# Altium PCB PCBREC1.1.PcbDoc
Units mil, origin at the board's own origin, x right, y up, seen from the top; angles counter-clockwise.
Board outline 2635 x 3180 mil, 2 copper layers (Top Layer, Bottom Layer); 35 components, 21 nets, 93 pads, 15 vias.
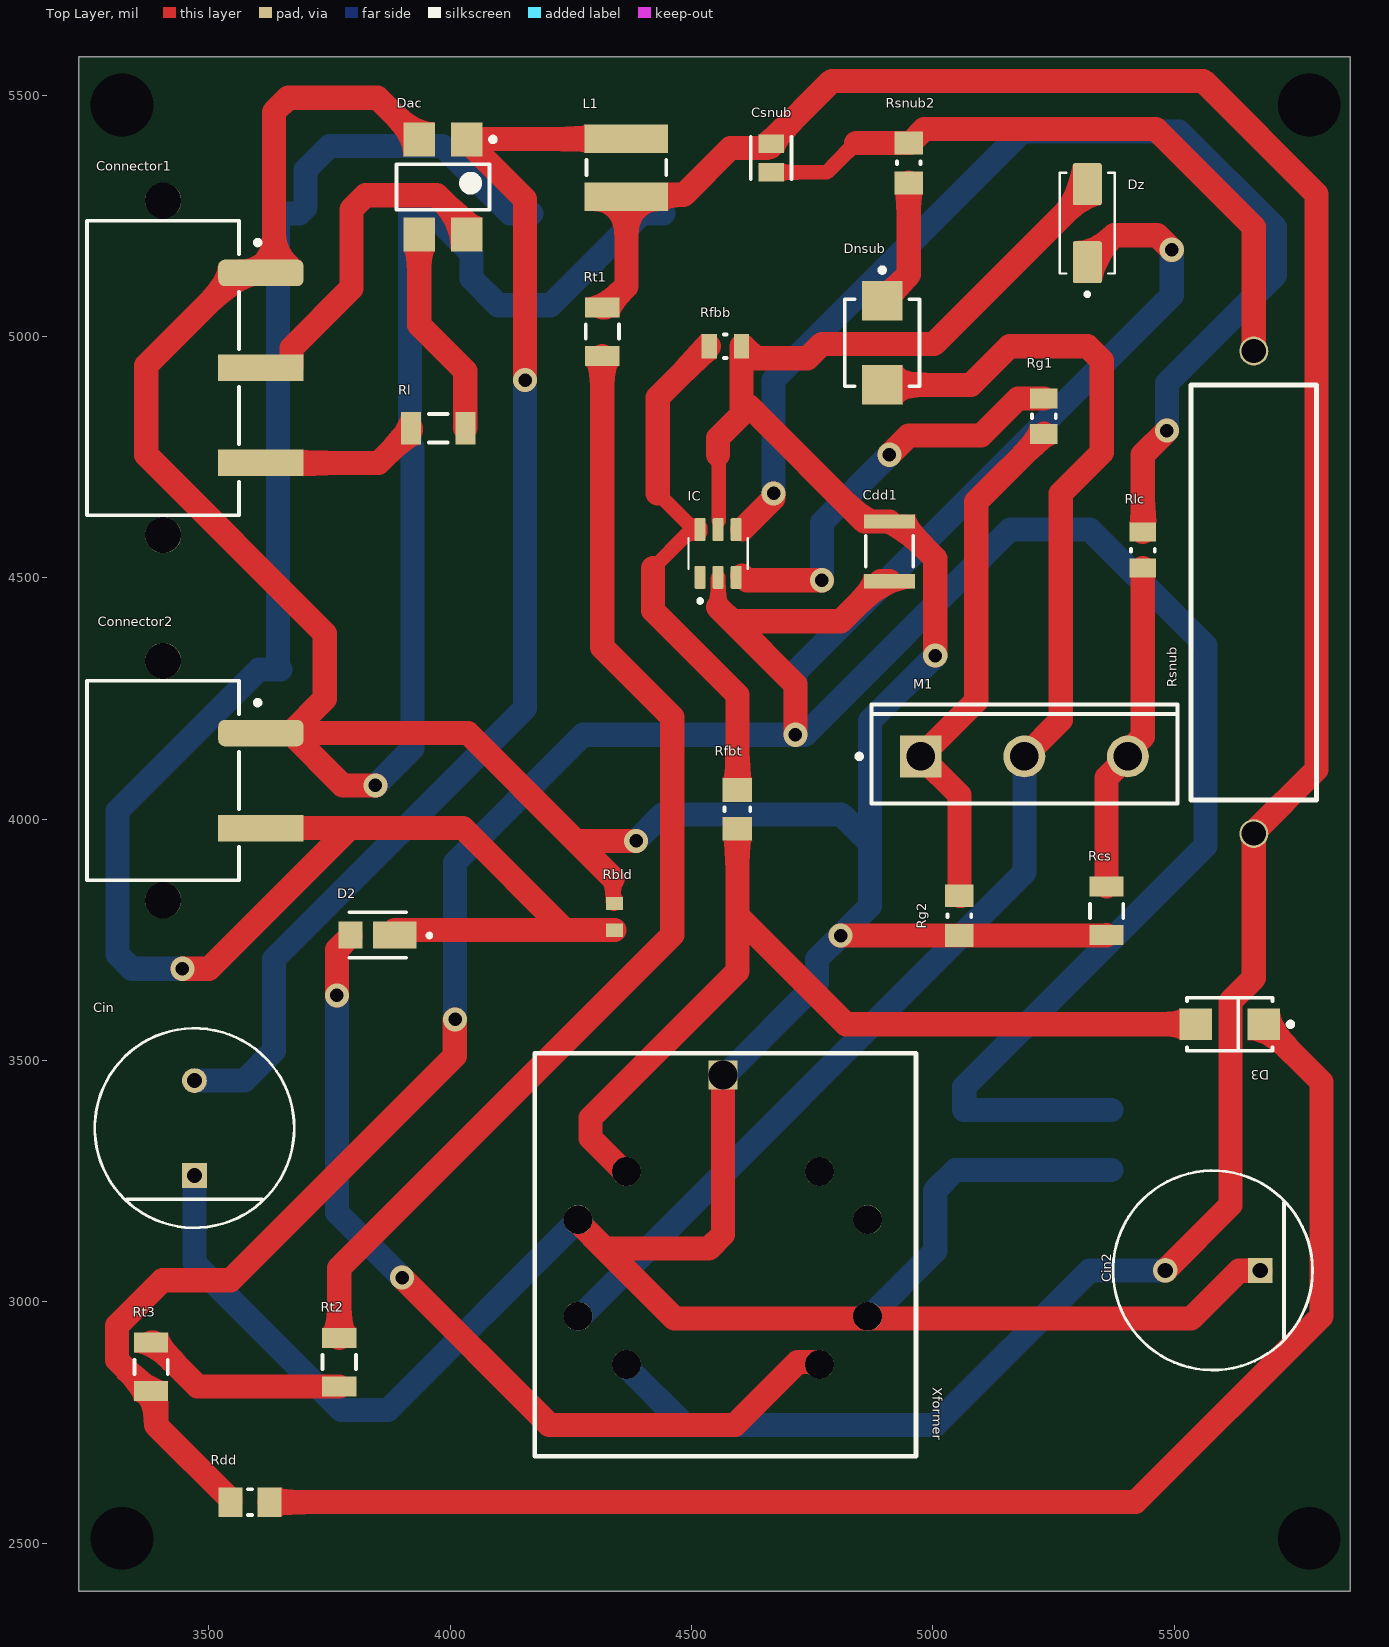
[diagram p0: Top Layer view]
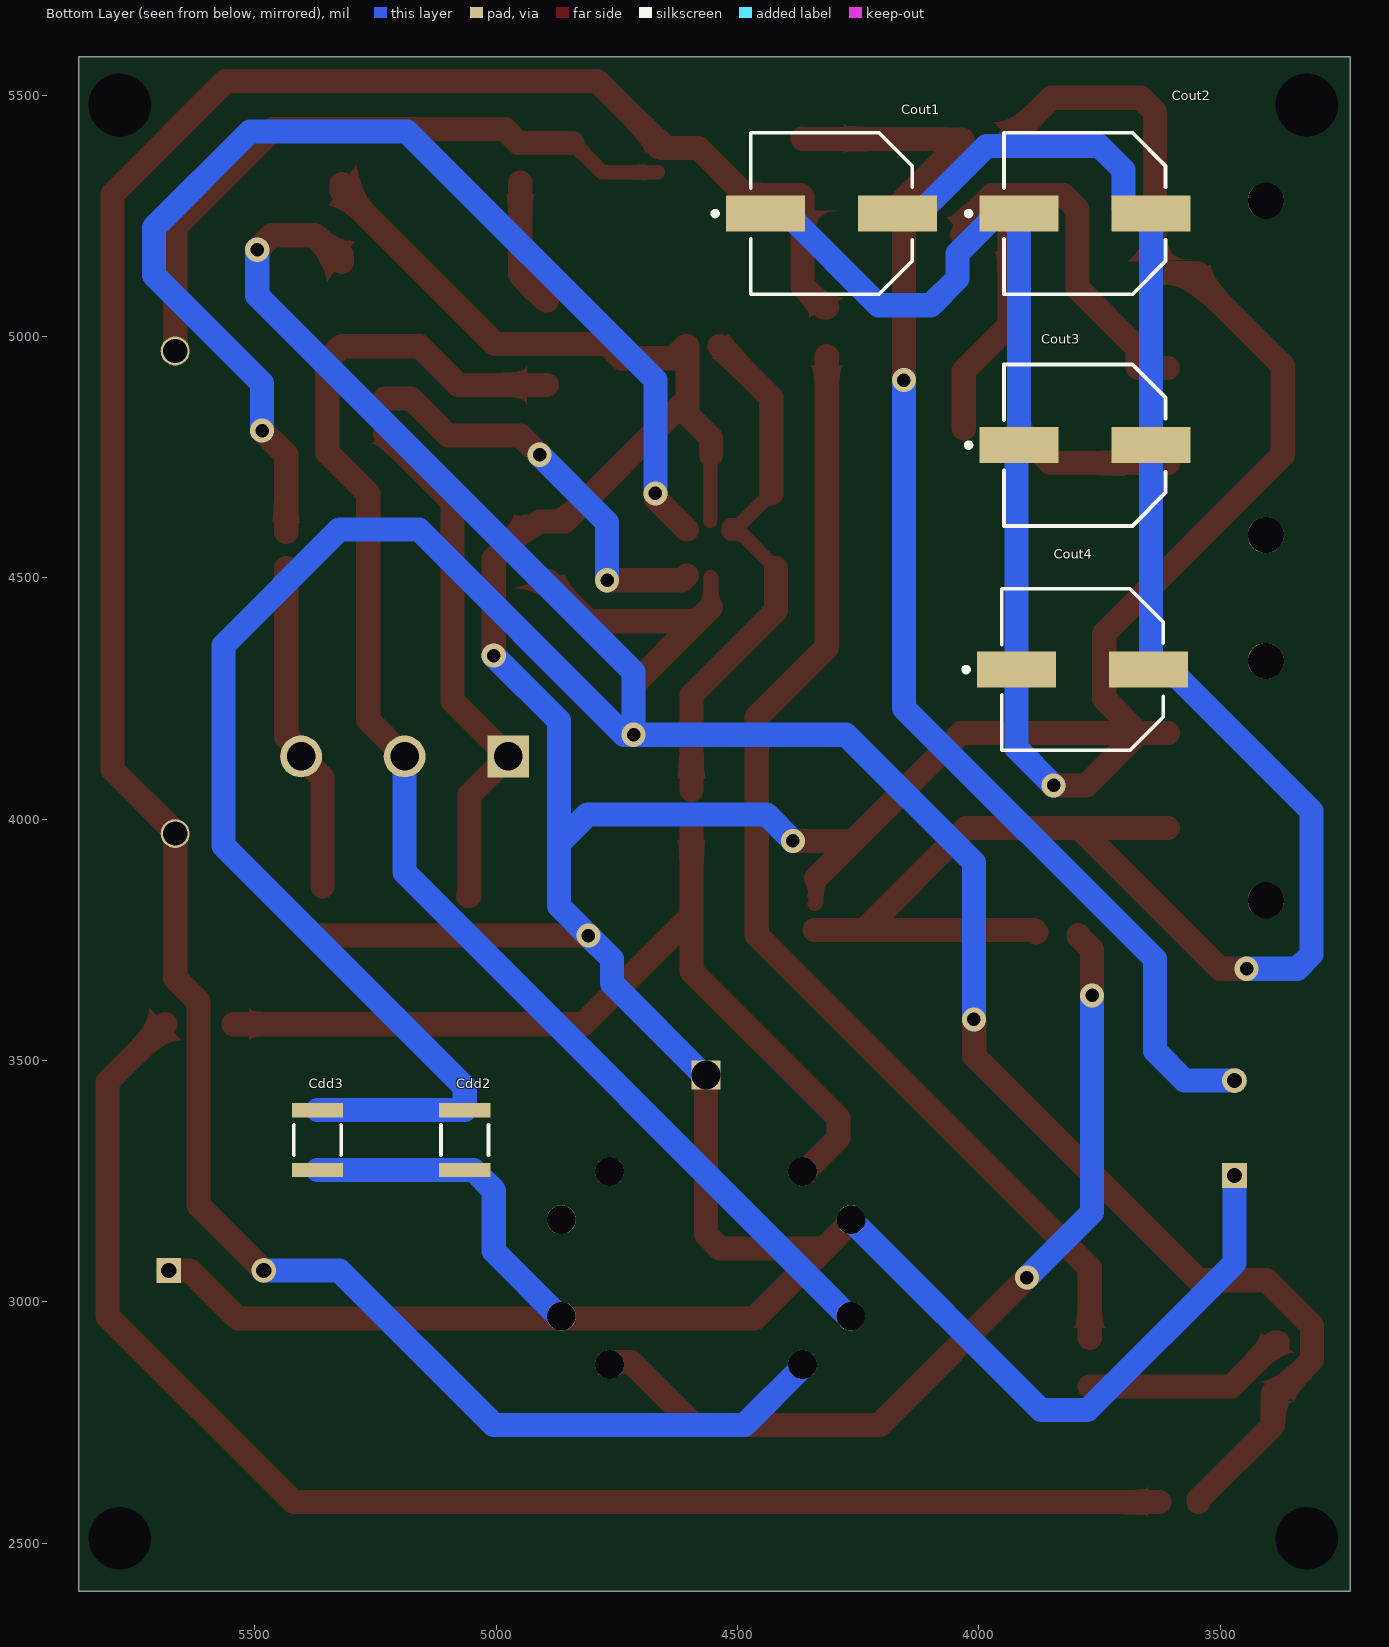
[diagram p1: Bottom Layer view, seen from below]
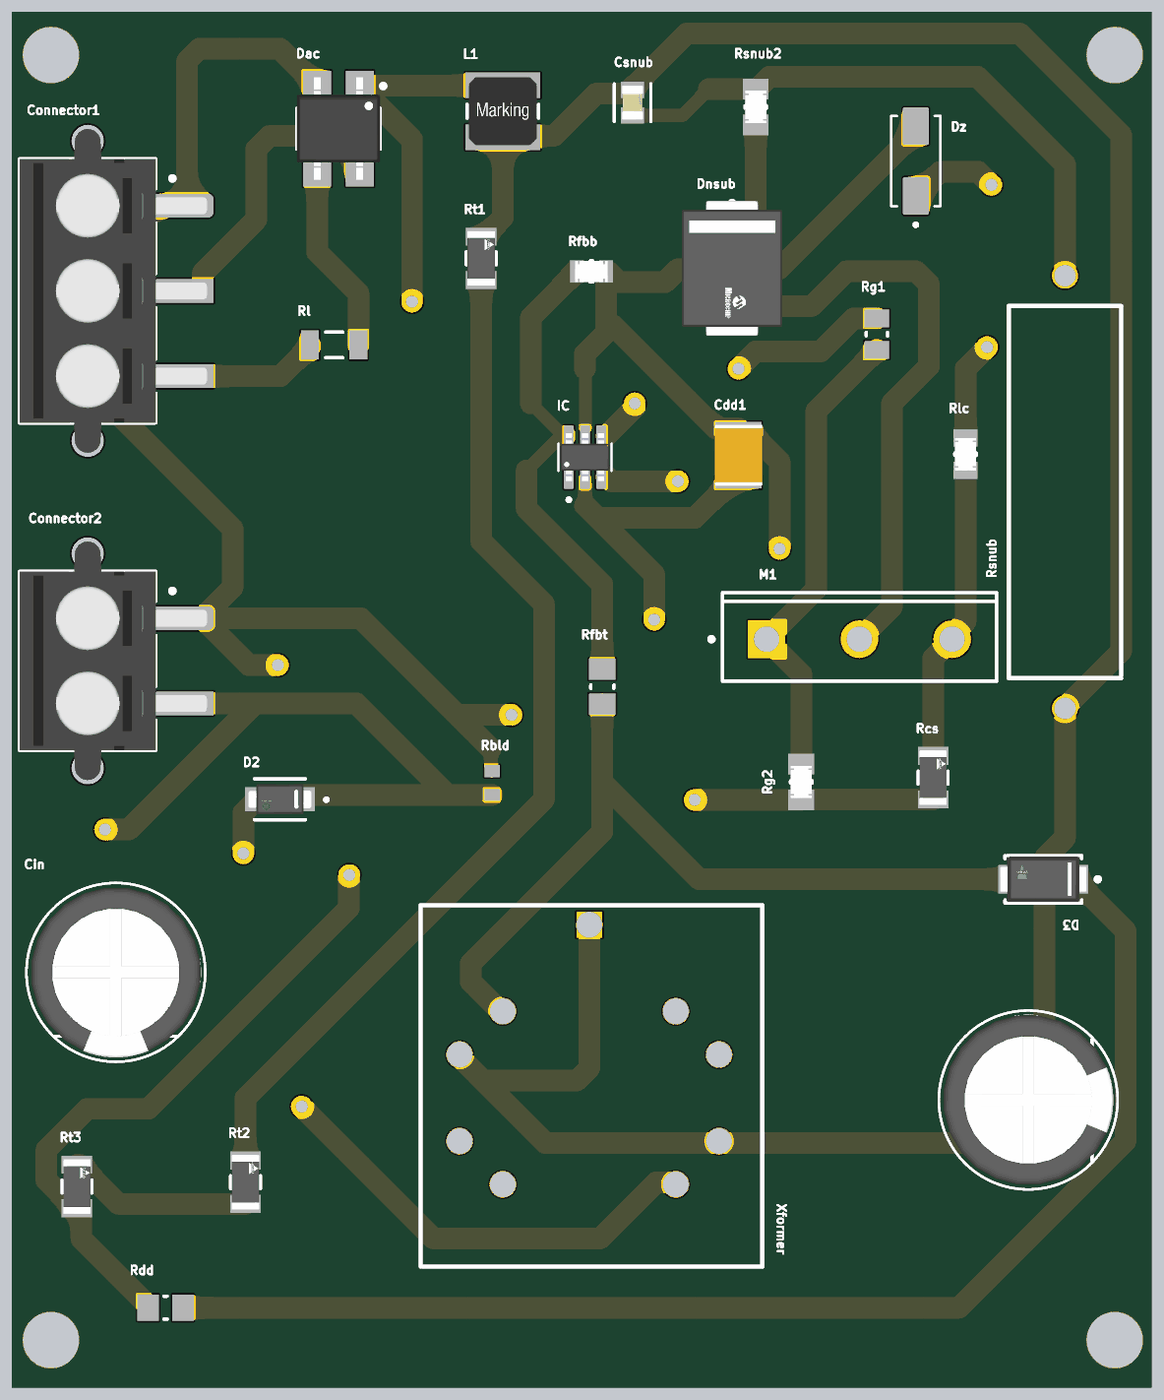
[diagram p2: 3D render of the assembled board from above, using the file's embedded part models]
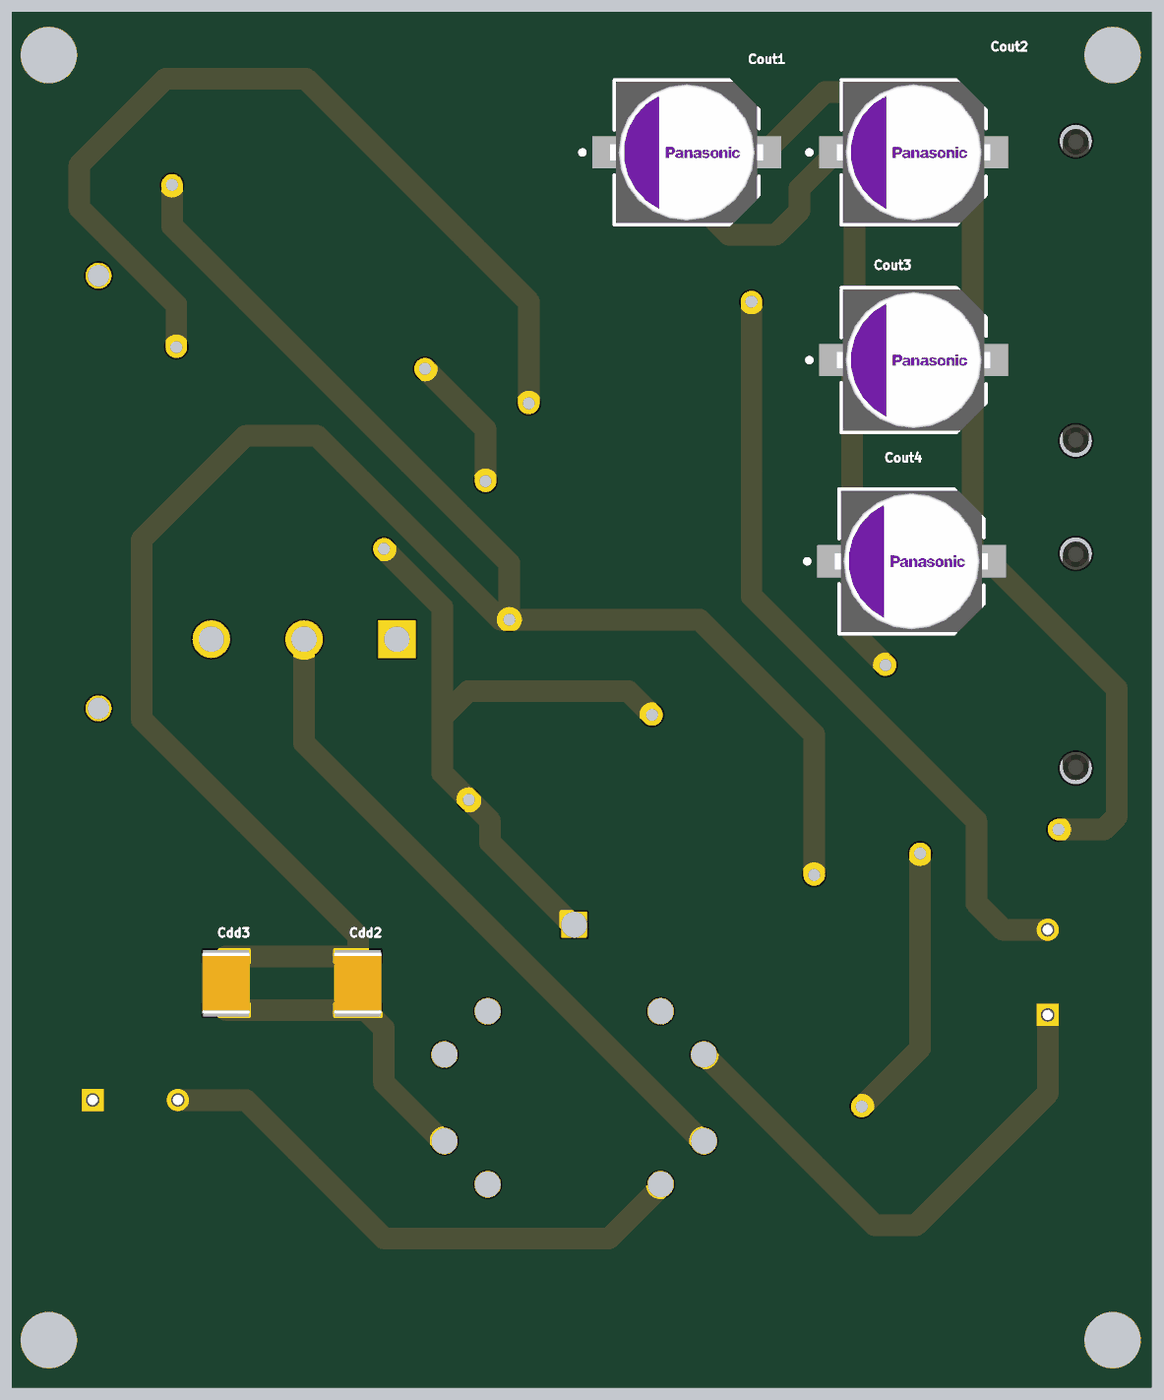
[diagram p3: 3D render of the assembled board from below, using the file's embedded part models]

## Layer stack, top to bottom
Top Solder: solder mask 0.4, Solder Resist, Dk 3.5
Top Layer: signal copper 1.4
Dielectric 1: dielectric 12.6, FR-4, Dk 4.8
Bottom Layer: signal copper 1.4
Bottom Solder: solder mask 0.4, Solder Resist, Dk 3.5

## Board outline
3230,2400 5865,2400 5865,5580 3230,5580

## Design rules (kind name [scope] priority, off if disabled: settings)
Clearance [All] p1: gap=5 ignorepadtopadclearanceinfootprint=FALSE
HoleSize [All] p1: absolutevalues=TRUE maxlimit=250 minlimit=10 maxpercent=80.000 minpercent=20.000
PolygonConnect [All] p1: connectstyle=Relief reliefconductorwidth=10 reliefentries=4 polygonreliefangle="90 Angle" airgapwidth=10
RoutingVias [All] p1: holewidth=28 width=50 viastyle="Through Hole" minholewidth=28 minwidth=50 maxholewidth=28 maxwidth=50
SolderMaskExpansion [All] p1: expansion=4 istentingtop=FALSE
Width [All] p1: maxlimit=50 minlimit=30 preferedwidth=50
29 further rules are at their usual default settings.

## Components (designator, comment, footprint, x,y, rotation, side; value= is the part's Value field where it differs from the comment)
Cdd1 "C3225X7R2A225K230AB" CAPC3225X250X20LL40 4910,4555 r270 top
Cdd2 "C3225X7R2A225K230AB" CAPC3225X250X20LL40 5065,3335 r90 bottom
Cdd3 "C3225X7R2A225K230AB" CAPC3225X250X20LL40 5370,3335 r90 bottom
Cin "EEUED2G100" FP-RAD-TH-D_10_0_5-L_20_2-MFG 3470,3360 r90 top
Cin2 "EEUED2G100" FP-RAD-TH-D_10_0_5-L_20_2-MFG 5580,3065 r180 top
Connector1 "691709710303" 691709710303 3405,4935 r270 top
Connector2 "691709710302" 691709710302 3405,4080 r270 top
Cout1 "16SVPF560M" FP-OS-CON-SMT-E12-MFG 4305,5255 r180 bottom
Cout2 "16SVPF560M" FP-OS-CON-SMT-E12-MFG 3780,5255 r180 bottom
Cout3 "16SVPF560M" FP-OS-CON-SMT-E12-MFG 3780,4775 r180 bottom
Cout4 "16SVPF560M" FP-OS-CON-SMT-E12-MFG 3785,4310 r180 bottom
Csnub "C0805C103K1RACTU" FP-C0805C-DN-MFG 4665,5370 r270 top value="10,000 pF"
D2 "TSSE3H60" FP-425AC-MFG 3849.57,3760 r180 top
D3 "VS-10MQ100NTRPBF" FP-95400-MFG 5615,3575 r180 top value=38pF
Dac "HD06-T" DIOD-MiniDIP-4_V 3985,5310 r270 top
Dnsub "UFS180JE3/TR13" FP-DO-214BA-MFG 4895,4987.2 r270 top
Dz "Dz" DIOM505270X240 5320,5235 r90 top (schematic designator *)
IC "UCC28700DBVR" SOT95P280X145-6N 4555,4550.59 r90 top
L1 "74404043471A" WE-LQS_4025 4365,5350.04 r270 top
M1 "SPW11N80C3" INF-PG-TO247-3-21 5190,4130 r90 top
Rbld "RC0603FR-0763R4L" RESC1608X55X25NL10T15 4340,3797.56 r270 top
Rcs "CRCW12061R54FKEA" FP-CRCW1206-e3-MFG 5360,3810 r90 top
Rdd "CRCW080522R1FKEA" RESC2013X50X30ML20T20 3585,2585 r0 top
Rfbb "CRCW080534K8FKEA" FP-CRCW0805-e3-IPC_C 4570,4980 r180 top
Rfbt "CRCW0805118KFKEA" RESC2013X50X30ML20T20 4595,4020.35 r270 top
Rg1 "CRCW080510R0FKEA" RESC2013X50X30NL20T20 5230,4835 r90 top
Rg2 "CRCW080510K0FKEA" FP-CRCW0805-e3-IPC_A 5055,3800 r90 top
Rl "RC1206FR-0725R5L" RESC3116X65X40NL10T20 3975,4810 r0 top
Rlc "CRCW08053K83FKEA" FP-CRCW0805-e3-IPC_B 5435,4557.56 r90 top
Rsnub "PR03000206202JAC00" PCBComponent_1#1 5665,3970 r180 top (schematic designator R)
Rsnub2 "CRCW0805464RFKEA" FP-CRCW0805-e3-IPC_A 4950,5360 r90 top
Rt1 "CRCW12062M26FKEA" FP-CRCW1206-e3-MFG 4315,5010.2 r90 top
Rt2 "CRCW12062M26FKEA" FP-CRCW1206-e3-MFG 3770,2875 r90 top
Rt3 "CRCW12062M26FKEA" FP-CRCW1206-e3-MFG 3380,2865 r90 top
Xformer "Xformer" PCBComponent_1#2 4865,2980 r90 top (schematic designator X*)

## Footprints (in the part's own frame and the unit in brackets; to place one, negate y for a bottom-side part, rotate by r counter-clockwise, add the part's x,y. Pads: shape width x height; smd on the part's side, far side on the other; paste and mask are expansions set on the pad)
691709710302 [mm] "Horizontal Entry SMT with Pressure Clamp, pitch 5mm, 02p"
  rrect50% 1.4x4.5 smd: 1(-2.5,5.15)
  rect 1.4x4.5 smd: 2(2.5,5.15)
  round 1.9 hole 1.9 unplated: M1(-6.3,0) M2(6.3,0)
  silkscreen extent -5.25,-4 5.25,5.1, body extent -7,-4 7,7, height 9.95
691709710303 [mm] "Horizontal Entry SMT with Pressure Clamp, pitch 5mm, 03p"
  rrect50% 1.4x4.5 smd: 1(-5,5.15)
  rect 1.4x4.5 smd: 2(0,5.15) 3(5,5.15)
  round 1.9 hole 1.9 unplated: M1(-8.8,0) M2(8.8,0)
  silkscreen extent -7.75,-4 7.75,5.1, body extent -9.5,-4 9.5,7, height 9.95
CAPC3225X250X20LL40 [mm] "Chip Capacitor, 2-Leads, Body 3.60x2.80mm, IPC High Density"
  rect 0.75x2.7 smd: 1(-1.575,0) 2(1.575,0)
  silkscreen extent -0.8,-1.25 0.8,1.25, body extent -1.8,-1.4 1.8,1.4, height 2.5
DIOD-MiniDIP-4_V [mm] "SOIC, 4-Leads, Body 4.90x4mm, Pitch 2.50mm"
  rect 1.8x1.65 smd: 1(-2.5,1.25) 2(-2.5,-1.25) 3(2.5,-1.25) 4(2.5,1.25)
  silkscreen extent -2.62,-2.45 1.2,2.75, body extent -3,-2.45 3,2.45, height 3
DIOM505270X240 [mm]
  rrect15% 2.21x1.53 smd: 1(-2.05,0) 2(2.05,0)
  silkscreen extent -3.85,-1.45 2.65,1.45
FP-425AC-MFG [mm]
  rect 2.3x1.4 smd paste+0 mask+0: 1(-0.9,0)
  rect 1.25x1.4 smd paste+0 mask+0: 2(1.425,0)
  silkscreen extent -2.83,-1.2 1.5,1.2, body extent -2.15,-1.07 2.15,1.07, height 0.25
FP-95400-MFG [mm]
  rect 1.7x1.68 smd paste+0 mask+0: 1(-1.79,0) 2(1.79,0)
  silkscreen extent -3.33,-1.4 2.25,1.4, body extent -2.74,-1.5 2.74,1.5, height 0.25
FP-C0805C-DN-MFG [mm]
  rect 0.95x1.35 smd paste+0 mask+0: 1(-0.75,0) 2(0.75,0)
  silkscreen extent -1.1,-1.07 1.1,1.07, body extent -1.4,-0.85 1.4,0.85, height 0.25
FP-CRCW0805-e3-IPC_A [mil]
  rect 47.5x59.38 smd paste+0 mask+0: 1(-41.37,0) 2(41.37,0)
  silkscreen extent -3,-25 3,25, body extent -85,-49 85,49, height 10
FP-CRCW0805-e3-IPC_B [mil]
  rect 39.63x55.44 smd paste+0 mask+0: 1(-37.44,0) 2(37.44,0)
  silkscreen extent -3,-25 3,25, body extent -67,-38 67,38, height 10
FP-CRCW0805-e3-IPC_C [mil]
  rect 31.75x51.5 smd paste+0 mask+0: 1(-33.5,0) 2(33.5,0)
  silkscreen extent -3,-25 3,25, body extent -53,-31 53,31, height 10
FP-CRCW1206-e3-MFG [mm]
  rect 1.05x1.8 smd paste+0 mask+0: 1(-1.275,0) 2(1.275,0)
  silkscreen extent -0.38,-0.87 0.38,0.87, body extent -1.9,-1 1.9,1, height 0.25
FP-DO-214BA-MFG [mm]
  rect 2.08x2.13 smd paste+0 mask+0: 1(-2.215,0) 2(2.215,0)
  silkscreen extent -3.95,-1.97 2.28,1.97, body extent -3.35,-2.07 3.35,2.07, height 0.25
FP-OS-CON-SMT-E12-MFG [mm]
  rect 4.15x1.9 smd paste+0 mask+0: 1(-3.475,0) 2(3.475,0)
  silkscreen extent -6.25,-4.25 4.25,4.25, body extent -4.5,-4.15 4.5,4.15, height 12.01
FP-RAD-TH-D_10_0_5-L_20_2-MFG [mm]
  rect 1.3x1.3 hole 0.8 paste-1000 mask+0: 1(-2.5,0)
  round 1.3 hole 0.8 paste-1000 mask+0: 2(2.5,0)
  silkscreen extent -5.25,-5.25 5.25,5.25, body extent -5.35,-5.35 5.35,5.35, height 0.25
INF-PG-TO247-3-21 [mm] "FM, 3-Leads, Body 5.03x15.87mm, Pitch 5.44mm"
  rect 2.2x2.2 hole 1.5: 1(0,5.46)
  round 2.2 hole 1.5: 2(0,0.01) 3(0,-5.44)
  silkscreen extent -2.47,-8.05 2.73,8.82, body extent -2.47,-8.03 2.73,8.03, height 25.57
PCBComponent_1#1 [mil]
  round 60 hole 50: 10(0,0) 11(0,-1000)
  silkscreen extent -130,-930 130,-70
PCBComponent_1#2 [mil]
  round 60 hole 60: 1(-110,500) 2(-10,600) 3(190,600) 4(290,500) 5(-110,100) 6(-10,0) 7(190,0) 8(290,100)
  rect 60x60 hole 60: 9(490,300)
  silkscreen extent -300,-100 535,690, body extent -248,-48 478,658, height 1100
RESC1608X55X25NL10T15 [mm] "Chip Resistor, 2-Leads, Body 1.60x0.80mm, IPC Medium Density"
  rect 0.7x0.9 smd: 1(-0.7,0) 2(0.7,0)
  body extent -0.85,-0.45 0.85,0.45, height 0.55
RESC2013X50X30ML20T20 [mm] "Chip Resistor, 2-Leads, Body 2.00x1.25mm, IPC Low Density"
  rect 1.25x1.55 smd: 1(-1.025,0) 2(1.025,0)
  silkscreen extent -0.1,-0.67 0.1,0.67, body extent -1.1,-0.72 1.1,0.72, height 0.5
RESC2013X50X30NL20T20 [mm] "Chip Resistor, 2-Leads, Body 2.00x1.25mm, IPC Medium Density"
  rect 1.05x1.45 smd: 1(-0.925,0) 2(0.925,0)
  silkscreen extent -0.1,-0.63 0.1,0.63, body extent -1.1,-0.72 1.1,0.72, height 0.5
RESC3116X65X40NL10T20 [mm] "Chip Resistor, 2-Leads, Body 3.10x1.60mm, IPC Medium Density"
  rect 1.05x1.7 smd: 1(-1.425,0) 2(1.425,0)
  silkscreen extent -0.5,-0.75 0.5,0.75, body extent -1.6,-0.85 1.6,0.85, height 0.65
SOT95P280X145-6N [mm]
  rrect25% 1.21x0.58 smd: 1(-1.255,0.95) 2(-1.255,0) 3(-1.255,-0.95) 4(1.255,-0.95) 5(1.255,0) 6(1.255,0.95)
  silkscreen extent -2.6,-1.56 0.8,1.56, body extent -1.4,-1.45 1.4,1.45, height 1.45
WE-LQS_4025 [mm] "SMD Power Inductor, 2-Leads, body 4x4mm"
  rect 1.5x4.4 smd: 1(-1.525,0) 2(1.525,0)
  silkscreen extent -0.4,-2.1 0.4,2.1, body extent -2,-2 2,2, height 2.15

## Part data
Cdd1 Cdd2 Cdd3: library part CMP-2000-06053-1, "Chip Capacitor, 2.2 uF, +/- 10%, -55 to 125 degC, 1210 (3225 Metric), RoHS, Tape and Reel", Capacitance=2.2µF, Manufacturer=TDK, Operating Temperature=-55°C~125°C, Package / Case=1210(3225Metric), Package Description="2-Pin Surface Mount Device, Body 3.2 x 2.5 mm", Package Reference="1210 (3225 Metric)", PCN Part Number=MLCCPartNumberChange30/Nov/2012, Ratings=-, Standard Package=1, Temperature Coefficient=X7R, Tolerance=±10%, Voltage - Rated=100V, Applications=GeneralPurpose, Catalog Drawings=CSERIES_1210_2.5, Category=Capacitors, Datasheet URL=https://datasheet.ciiva.com/15192/getdatasheetpartid-725361-15192330.pdf, Datasheet Version=10/2014, Family=CeramicCapacitors, Featured Product=C-SeriesMidVoltageMLCCs, Features=-, Height - Seated (Max)=-, Lead Spacing=-, Lead Style=-, Manufacturer URL=http://www.tdk.com/, Mounting Technology=SurfaceMount, Mounting Type=SurfaceMount,MLCC, Online Catalog=CSeries,MidVoltage, Other Names=445-4497-6, Packaging=Digi-Reel®, Product Training Modules=SEAT,CCV,andTVCLDesignToolsGuidetoReplacinganElectrolyticCapacitorwithanMLCC, RoHS Information=RoHSCertificate-MLCC, Series=C, Size / Dimension="0.126\"Lx0.098\"W(3.20mmx2.50mm)", Thickness (Max)="0.098\"(2.50mm)"
Cin Cin2: library part CMP-05427-001613-1, "Aluminum Electrolytic Capacitors (Radial Lead Type) 10uF ±20% 400V", Capacitance=10uF, Case/Package=Radial, Dielectric Material=Aluminium, Max Operating Temperature=105°C, Min Operating Temperature=-25°C, Package Quantity=200, Ripple Current=300mA, Tolerance=20%, Voltage=400V, Construction=RADIAL, Contact Plating=Tin, Diameter=10mm, Dissipation Factor=0.24%, Height=20mm, Height - Seated (Max)=0.787inch, Lead Diameter=0.6mm, Lead Free="Lead Free", Lead Pitch=5mm, Length=20mm, Life (Hours)=8000Hour, Mount="Through Hole", Number of Pins=2, Packaging=Bulk, Polarity=Polar, Radiation Hardening=No, REACH SVHC="No SVHC", Ripple Current (AC)=300mA, RoHS Compliant=Yes, Series=ED, Termination=Radial, Voltage Rating=400V, Voltage Rating (DC)=400V
Connector1: library part CMP-1502-03336-2, Color=Black, Current=6A, Flammability Rating="UL94 V-0", Max Operating Temperature=130°C, Min Operating Temperature=-40°C, Voltage=300V, Connector Type=Screw, Contact Material=Nickel, Contact Plating=Tin, Current Rating=6A, Height=10.2mm, Housing Material=Nylon, Lead Pitch=5mm, Length=15mm, Mount="Surface Mount", NexarPartId=34171770, Number of contacts=3, Number of Levels=1, Number of Pins=3, Number of Positions=3, Number of Positions Per Level=3, Number of Rows=1, Packaging=Digi-Reel®, Pitch=5mm, Plating=Steel, REACH SVHC=Unknown, RoHS=Compliant, Termination=Screw, Voltage Rating=300V, Wire Gauge (Max)=30AWG, Wire Gauge (Min)=14AWG, Wire/Cable Gauge=30AWG
Connector2: library part CMP-1502-03335-2, Color=Black, Current=6A, Flammability Rating="UL94 V-0", Max Operating Temperature=130°C, Min Operating Temperature=-40°C, Voltage=300V, Connector Type=Screw, Contact Material=Tin, Contact Plating=Tin, Current Rating=6A, Height=11.1mm, Housing Material=Nylon, Lead Pitch=5mm, Length=10mm, Mount="Surface Mount", NexarPartId=34186867, Number of contacts=2, Number of Levels=1, Number of Pins=2, Number of Positions=2, Number of Positions Per Level=2, Number of Rows=1, Packaging=Digi-Reel®, Pitch=5mm, Plating=Steel, REACH SVHC=Unknown, RoHS=Compliant, Termination=Screw, Voltage Rating=300V, Wire Gauge (Max)=30AWG, Wire Gauge (Min)=14AWG, Wire/Cable Gauge=30AWG
Cout1 Cout2 Cout3 Cout4: library part CMP-05428-001239-1, "Conductive Polymer Aluminum Solid Capacitors (OS-CON) 560uF ±20% 16V", Capacitance=560uF, Case/Package=Radial, ESR (Equivalent Series Resistance)=14mR, Leakage Current=1.792mA, Max Operating Temperature=105°C, Min Operating Temperature=-55°C, Package Quantity=400, Ripple Current=4.95A, Tolerance=20%, Voltage=16V, Diameter=8mm, Dissipation Factor=12%, Height=11.9mm, Height - Seated (Max)=0.472inch, Lead Free="Lead Free", Length=11.9mm, Life (Hours)=5000Hour, Mount="Surface Mount", Number of Pins=12, Packaging="Tape and Reel", Polarity=Polar, REACH SVHC="No SVHC", Ripple Current (AC)=4.95A, RoHS Compliant=Yes, Series="OS-CON™, SVPF", Termination=SMD/SMT, Voltage Rating=16V, Voltage Rating (DC)=16V
Csnub: library part CMP-03020-018902-1, "CAP CER 10000PF 100V X7R 0805", Capacitance="10,000 pF", Manufacturer=KEMET, Package=C0805C-DN, Temperature="-55°C to +125°C", Temperature Characteristic=X7R, Temperature Coefficient=30ppm/°C, Temperature Range High=+125°C, Temperature Range Low=-55°C, Tolerance=0.1, Voltage Rating="100 V", Automotive=No, Category=Cap, ComponentLink2Description=Datasheet, ComponentLink2URL=https://content.kemet.com/datasheets/KEM_C1003_C0G_SMD.pdf, Device Class L1="Passive Components", Device Class L2=Capacitors, Device Class L3="Ceramic Capacitors", Digikey Description="CAP CER 10000PF 100V X7R 0805", Height=0.88mm, Ipc Land Pattern Name=CAPC200125X78, Lead Free=Yes, Manufacturer Part Number=C0805C103K1RACTU, Material=Ceramic, Mouser Description="Cap Ceramic 0.01uF 100V X7R 10% SMD 0805 125°C Paper T/R", Octopart=https://octopart.com/c0805c103k1ractu-kemet-97824, RoHS=TRUE
D2: Package=None, Availability=Unavailable, MF="Taiwan Semiconductor", MP=TSSE3H60, Price=None
D3: library part CMP-02539-000001-1, "DIODE SCHOTTKY 100V 1A SMA", Capacitance=38pF, Forward Current=1.5A, Manufacturer=Vishay, Max Junction Temp=+150°C, Max Repetitive Reverse Voltage=100V, Max Surge Forward Current=30A, Package=95400, Peak Reverse Current=0.1mA, Temperature="-55°C to +150°C", Temperature Range Low=-55°C, Automotive=No, Category=Diode, ComponentLink2Description=Datasheet, ComponentLink2URL=http://www.vishay.com/docs/94119/vs-10mq100ntrpbf.pdf, Device Class L1="Discrete Semiconductors", Device Class L2=Diodes, Device Class L3="Schottky Diodes", Digikey Description="DIODE SCHOTTKY 100V 1A SMA", Footprint Url=https://www.vishay.com/docs/95400/sma.pdf, Height=2.29mm, Lead Free=Yes, Manufacturer Part Number=VS-10MQ100NTRPBF, Mouser Description="DIODE SCHOTTKY 100V 1A SMA", Octopart=https://octopart.com/vs-10mq100ntrpbf-vishay-44340924, Reverse Voltage=100V, RoHS=TRUE, Standoff Height=0mm, Temperature Range High=+150°C
Dac: library part CMP-2000-06395-1, "Glass Passivated Bridge Rectifier, 0.8 A, 600 V, -55 to 150 degC, 4-Pin MiniDIP, RoHS, Tape and Reel", Average Rectified Current-Max=0.8A, Forward Voltage=1V, Manufacturer="Diodes Inc", Package Description="4-Pin Small Outline Integrated Circuit, Body 4.7 x 3.8 mm, Pitch 2.5 mm", Package Reference=MiniDIP-4, Package Version=05/2016, Peak Current-Max=30A, Reverse Current-Max=5µA, Reverse Voltage-Max [Vrrm]=600V, Datasheet URL=http://www.diodes.com/_files/datasheets/ds17003.pdf, Datasheet Version="Rev. 13-2, 12/2010", Manufacturer URL=http://www.diodes.com/, Mounting Technology=SurfaceMount, Package URL=http://www.diodes.com/_files/packages/MiniDIP.pdf
Dnsub: library part CMP-00252-99194895-1, "UFS180JE3/TR13 Rectifier Diode, 1 Phase, 1 Element, 1A, 800V V(RRM)", Average Rectified Current=1A, Max Reverse Voltage (DC)=800V, Lead Free="Lead Free", Mount="Surface Mount", NexarPartId=99194895, Number of Pins=2, Reverse Recovery Time=60ns, RoHS=Compliant
Dz Rsnub: library part Component_1
IC: library part Component_2
L1: library part CMP-03913-77814864-1, "74404043471A Inductor, 470Uh, Semishielded, 0.25A Rohs Compliant: Yes", Ambient Temperature Range High=85°C, Ambient Temperature Range Low=-40°C, Current Rating=250mA, DC Resistance (DCR)=4.15Ω, Inductance=470µH, Inductance Tolerance=20%, Max Operating Temperature=125°C, Height=2.5mm, Length=4mm, Min Operating Temperature=-40°C, NexarPartId=77814864, RoHS=Compliant, Width=4mm
M1: library part CMP-1165-00025-1, "N-Channel CoolMOS Power-Transistor, 800 V VDS, 11 A ID, -55 to 150 degC, PG-TO247-3-21, Tube, Green", Manufacturer=Infineon, ComponentLink1Description="Manufacturer URL", ComponentLink1URL=http://www.infineon.com/, ComponentLink2Description=Datasheet, ComponentLink2URL=http://www.infineon.com/dgdl/SPW11N80C3_rev2.91.pdf?folderId=db3a304412b407950112b408e8c90004&fileId=db3a304412b407950112b42bf6e0463d, ComponentLink3Description="Package Specification", ComponentLink3URL=http://www.infineon.com/dgdl/DS_IK30N100T_1_1.pdf?folderId=db3a304412b407950112b408e8c90004&fileId=db3a304316f66ee80116f7b6e3920050&location=en.Products.IGBTs.IGBT_with_Anti-Parallel_Diode.TRENCHSTOP__IGBT_for_Hard_Switching.DATASHEET.DS_IK30N100T_1_1.pdf, DatasheetVersion="Rev. 2.91", Green=TRUE, Halogen-free=available, ID (max)="11Â A", IDpuls (max)="33Â A", Mode=Enhancement, Mounting Technology="Through Hole", PackageDescription="3-Pin Plastic (Green) Transistor Single Outline Package, 15.87 x 20.96 mm Body, 5.44 mm Pitch", PackageReference=PG-TO247-3-21, PackageVersion=Oct-07, Packing=Tube, PartNumber=SPW11N80C3, Polarity=N, Ptot (max)="156Â W", QG="64Â nC", RDS (on) (max)="450Â mOhm", Rth="0.8Â K/W", RthJA (max)="62Â K/W", RthJC (max)="0.8Â K/W", Technology="CoolMOS C3", VDS (max)="800Â V", VGS(th) (max)="3.9Â V", VGS(th) (min)="2.1Â V"
Rbld: library part CMP-2000-04106-1, Manufacturer=Yageo, Part Number=RC0603FR-0763R4L
Rcs: library part CMP-02407-002193-1, "RES Thick Film, 1.54Ω, 1%, 0.25W, 100ppm/°C, 1206", Case Code (Imperial)=1206, Case Code (Metric)=3216, Max Operating Temperature=155°C, Max Power Dissipation=250mW, Min Operating Temperature=-55°C, Package Quantity=10, Resistance=1.54R, Temperature Coefficient=100ppm/°C, Tolerance=1%, Voltage Rating=200V, Case/Package=1206, Composition="Thick Film", Contact Plating=Tin, Features="Automotive AEC-Q200", Height=0.024inch, Lead Free="Lead Free", Length=0.126inch, Number of Terminations=2, Packaging="Tape and Reel", Power Rating=250mW, Radiation Hardening=No, Termination=SMD/SMT, Voltage Rating (DC)=200V, Weight=0.000353oz, Width=0.063inch
Rdd: library part CMP-2001-03695-1, Manufacturer="Vishay Dale", Part Number=CRCW080522R1FKEA
Rfbb: library part CMP-2001-03838-2, "RES Thick Film, 34.8kΩ, 1%, 0.125W, 100ppm/°C, 0805", Case Code (Imperial)=0805, Case Code (Metric)=2012, Max Operating Temperature=155°C, Min Operating Temperature=-55°C, Package Quantity=5000, Power Rating=125mW, Resistance=34.8kR, Temperature Coefficient=100ppm/°C, Tolerance=1%, Voltage Rating=150V, Case/Package=0805, Composition="Thick Film", Contact Plating=Tin, Depth=1.25mm, Height=0.45mm, Lead Free="Lead Free", Length=2mm, Military Standard=Not, Number of Pins=2, Packaging="Tape and Reel", Termination=SMD/SMT, Voltage Rating (DC)=150V, Weight=0.000194oz, Width=1.25mm
Rfbt: library part CMP-2001-04922-1, Manufacturer="Vishay Dale", Part Number=CRCW0805118KFKEA
Rg1: library part CMP-2001-04915-1, Manufacturer="Vishay Dale", Part Number=CRCW080510R0FKEA
Rg2: library part CMP-2001-04908-2, "RES Thick Film, 10kΩ, 1%, 0.125W, 100ppm/°C, 0805", Case Code (Imperial)=0805, Case Code (Metric)=2012, Max Operating Temperature=155°C, Min Operating Temperature=-55°C, Package Quantity=5000, Power Rating=125mW, Resistance=10kR, Temperature Coefficient=100ppm/°C, Tolerance=1%, Voltage Rating=150V, Case/Package=0805, Composition="Thick Film", Contact Plating=Tin, Depth=1.25mm, Height=0.45mm, Lead Free="Lead Free", Length=2mm, Military Standard=Not, Packaging="Tape and Reel", Radiation Hardening=No, Termination=SMD/SMT, Voltage Rating (DC)=150V, Weight=0.000194oz, Width=1.25mm
Rl: library part CMP-1014-00328-2, Manufacturer=Yageo, Part Number=RC1206FR-0725R5L
Rlc: library part CMP-2001-03885-2, "RES Thick Film, 3.83kΩ, 1%, 0.125W, 100ppm/°C, 0805", Case Code (Imperial)=0805, Case Code (Metric)=2012, Max Operating Temperature=155°C, Max Power Dissipation=125mW, Min Operating Temperature=-55°C, Package Quantity=5000, Resistance=3.83kR, Temperature Coefficient=100ppm/°C, Tolerance=1%, Voltage Rating=150V, Case/Package=0805, Composition="Thick Film", Contact Plating=Tin, Depth=1.25mm, Features="Automotive AEC-Q200", Height=0.45mm, Lead Free="Lead Free", Length=2mm, Military Standard=Not, Number of Pins=2, Number of Terminations=2, Packaging="Tape and Reel", Power Rating=125mW, Radiation Hardening=No, Termination=SMD/SMT, Voltage Rating (DC)=150V, Weight=0.000194oz, Width=1.25mm, Working Voltage=150V
Rsnub2: library part CMP-2001-03927-2, "RES Thick Film, 464Ω, 1%, 0.125W, 100ppm/°C, 0805", Case Code (Imperial)=0805, Case Code (Metric)=2012, Max Operating Temperature=155°C, Max Power Dissipation=125mW, Min Operating Temperature=-55°C, Package Quantity=5000, Resistance=464R, Temperature Coefficient=100ppm/°C, Tolerance=1%, Voltage Rating=150V, Case/Package=0805, Composition="Thick Film", Contact Plating=Tin, Depth=1.25mm, Features="Automotive AEC-Q200", Height=0.45mm, Lead Free="Lead Free", Length=2mm, Military Standard=Not, Number of Terminations=2, Packaging="Tape and Reel", Power Rating=125mW, Radiation Hardening=No, Termination=SMD/SMT, Voltage Rating (DC)=150V, Weight=0.000194oz, Width=0.049inch
Rt1 Rt2 Rt3: library part CMP-02407-002001-1, "RES Thick Film, 2.26MΩ, 1%, 0.25W, 100ppm/°C, 1206", Case Code (Imperial)=1206, Case Code (Metric)=3216, Max Operating Temperature=155°C, Max Power Dissipation=250mW, Min Operating Temperature=-55°C, Package Quantity=10, Resistance=2.26MR, Temperature Coefficient=100ppm/°C, Tolerance=1%, Voltage Rating=200V, Case/Package=1206, Composition="Thick Film", Contact Plating=Tin, Depth=1.6mm, Features="Automotive AEC-Q200", Height=0.024inch, Lead Free="Lead Free", Length=3.2mm, Military Standard=Not, Mount="Surface Mount", Number of Pins=2, Number of Terminations=2, Packaging="Tape and Reel", Power Rating=250mW, Radiation Hardening=No, Voltage Rating (DC)=200V, Weight=0.000353oz, Width=0.063inch
Xformer: library part Component_4

## Free pads (board coordinates)
  round 60 hole 130: 1(3320,5480) 2(5780,5480) 3(3320,2510) 4(5780,2510)

## Via types
v1: diameter 50, hole 28, Top Layer to Bottom Layer, 15 vias

## Nets (pads, with @x,y where several pads share a name; then routed paths per layer and width w, separated by ;. In a path a pad name is that pad's centre, name@x,y a point inside that pad or via, vN(x,y) a via of type N, cw(c..) or ccw(c..) an arc to the next point about the centre after c; other vN are vias at no path point)
Net*_1: Cdd1.2 Cdd2.2 Cdd3.2 Dz.1 IC.2 Rdd.1 Rt3.1 | length 7516.4
  Top Layer w30: 4555,4439.29 IC.2
  Top Layer w50: Rdd.1 3544.65,2590.12 3390.43,2744.33 3390.43,2810.47 3386.1,2814.8 Rt3.1 3373.9,2814.8 3309.57,2879.13 3309.57,2950.36 3403.79,3044.59 3544.59,3044.59 4009.29,3509.29 4009.29,3584.29 v1(4010,3585) ; 4555,4439.29 4584.29,4410 ; v1(4715,4175) 4715,4279.29 4584.29,4410 ; Cdd1.2 4892.09,4492.99 4809.09,4410 4584.29,4410 ; Dz.1 5320,5167.68 5325.12,5172.8 5338.5,5172.8 5375.71,5210 5465,5210 v1(5495,5180)
  Bottom Layer w50: v1(4010,3585) 4010,3910 4275,4175 v1(4715,4175) ; Cdd3.2 Cdd2.2 5065,3445 5565,3945 5565,4360 5325,4600 5160,4600 4735,4175 v1(4715,4175) ; v1(5495,5180) 5495,5085 4715,4305 v1(4715,4175)
Net*_2: Cdd1.1 Cdd2.1 Cdd3.1 Cin2.1 Cin.1 Connector1.1 Connector2.1 Cout1.1 Cout2.1 Cout3.1 Cout4.1 Dac.2 Dz.2 IC.5 Rbld.1 Rcs.1 Rfbb.1 Rg2.1 Xformer.3 Xformer.6 Xformer.9 | length 13346.9
  Top Layer w30: 4337.28,3877.6 4337.28,3826.34 4338.5,3825.12 Rbld.1 ; 4555,4755 4555.98,4754.02 IC.5@4555.98,4618.18
  Top Layer w50: Connector2.1 Connector2.1@3668.78,4178.43 ; v1(3845,4070) 3777.2,4070 Connector2.1@3668.78,4178.43 ; Dac.2 3935.79,5411.38 3928.31,5418.86 3925.35,5418.86 3849.21,5495 3664.29,5495 3635,5465.71 3635,5134.41 3632.44,5131.85 Connector1.1 3546.73,5131.85 3544.17,5129.29 3544.17,5114.17 3370,4940 3370,4754.98 3740,4384.98 3740,4249.65 Connector2.1@3668.78,4178.43 ; Xformer.3@4265,3165 4320,3110 ; 4337.28,3877.6 4260,3954.88 ; v1(4385,3955) 4384.88,3954.88 4260,3954.88 ; 4555,4755 4555,4790 4603.5,4838.5 Rfbb.1 4607.79,4980 4632.79,4955 4740,4955 4770,4985 5002.68,4985 5320,5302.32 Dz.2 ; Xformer.9@4565,3465 4565,3139.29 4535.71,3110 4320,3110 ; 4620,4855 4857.99,4617.01 Cdd1.1 ; v1(4808.63,3758.63) Rg2.1 5055.59,3759.22 5359.41,3759.22 Rcs.1 ; Cdd1.1@4938.15,4606.77 5005,4539.92 v1(5005,4338.83) ; Cin2.1 5677.83,3064.41 5634.41,3064.41 5535,2965 4465,2965 4320,3110 ; Connector2.1@3668.78,4178.43 4036.46,4178.43 4260,3954.88
  Bottom Layer w50: Cin.1 3470,3080 3774.29,2775.71 3870.71,2775.71 Xformer.3 ; v1(3845,4070) 3921.81,4146.81 Cout4.1 3921.81,4770 Cout3.1 Cout2.1 3961.1,5255 4044.21,5171.89 4044.21,5120.07 4099.29,5065 4207.52,5065 4397.52,5255 Cout1.1 ; v1(4385,3955) 4440,4010 4810,4010 4867.09,3952.91 ; Xformer.9@4565,3465 4760,3660 4760,3710 v1(4808.63,3758.63) 4870,3820 4870,4203.83 v1(5005,4338.83) ; Xformer.6@4865,2965 5005,3105 5005,3230.91 5047.09,3272.99 Cdd2.1 Cdd3.1
NetCin2_2: Cin2.2 Csnub.1 L1.2 Rsnub.10 Rt1.2 Xformer.1 | length 5544.8
  Top Layer w50: Rt1.2 4321.1,5060.39 4365,5104.29 L1.2 4368.6,5293.6 4483.6,5293.6 4580.82,5390.82 4656.29,5390.82 4658.7,5393.23 4663.43,5393.23 4665,5394.8 Csnub.1 4665,5404.25 4790.67,5529.92 5560.08,5529.92 5795,5295 5795,4102.71 5665,3972.71 Rsnub.10 5665,3670.56 5617.01,3622.57 5617.01,3200.43 Cin2.2
  Bottom Layer w50: Xformer.1@4365,2865 4485,2745 5005,2745 5325,3065 Cin2.2
NetCin_2: Cin.2 Dac.1 L1.1 | length 2675.5
  Top Layer w50: 4071.57,5408.43 Dac.1 4034.21,5405.47 4155,5284.69 v1(4155,4910) ; 4071.57,5409.25 4364.17,5409.25 L1.1
  Bottom Layer w50: Cin.2 3573.43,3458.43 3635,3520 3635,3710 4155,4230 v1(4155,4910)
NetConnector1_2: Connector1.2 Dac.4 | length 737.8
  Top Layer w50: Connector1.2 3668.78,4935 3671.34,4937.56 3671.34,4976.34 3795,5100 3795,5263.43 3824.29,5292.72 3972.05,5292.72 4026.73,5238.04 4026.73,5219.06 Dac.4
NetConnector1_3: Connector1.3 Rl.1 | length 343.3
  Top Layer w50: Connector1.3 3851.18,4738.15 3918.9,4805.87 Rl.1
NetConnector2_2: Connector2.2 Cout1.2 Cout2.2 Cout3.2 Cout4.2 Rbld.2 | length 4183.4
  Top Layer w50: v1(3445,3690) 3500,3690 3791.57,3981.57 ; Connector2.2 3791.57,3981.57 ; 3880,3765 3885,3770 4237.77,3770 ; Rbld.2 4237.77,3770 ; 3791.57,3981.57 4026.19,3981.57 4237.77,3770
  Bottom Layer w50: v1(3445,3690) 3340,3690 3310.71,3719.29 3310.71,4016.81 3603.9,4310 Cout4.2 3643.19,4315 Cout3.2 Cout2.2 3687.48,5255 3699.88,5267.4 3699.88,5344.88 3750,5395 3983.9,5395 4123.9,5255 Cout1.2
NetCsnub_2: Csnub.2 Rsnub2.2 Rsnub.11 | length 1378.1
  Top Layer w30: Csnub.2 4780.47,5340.47 4841.37,5401.37
  Top Layer w50: 4841.37,5401.37 4953.44,5401.37 4982.07,5430 5461.89,5430 5665,5226.89 Rsnub.11
NetD2_A: Xformer.5
NetD3_1: D3.1 Rdd.2 | length 2993.5
  Top Layer w50: Rdd.2@3625.75,2584.88 5419.88,2584.88 5805,2970 5805,3455.47 5693.94,3566.54 5693.94,3566.93 5685.87,3575 D3.1
NetD3_2: D3.2 Rfbt.2 Xformer.4 | length 1914.5
  Top Layer w50: Xformer.4@4365,3265 4290.71,3339.29 4290.71,3380.71 4595,3685 4595,3800 ; Rfbt.2 4595,3800 ; D3.2 4820,3575 4595,3800
NetDac_3: Dac.3 Rl.2 | length 441.1
  Top Layer w50: Dac.3 3935.79,5024.21 4031.1,4928.9 Rl.2
NetDnsub_1: Dnsub.1 Rsnub2.1 | length 267.6
  Top Layer w50: Dnsub.1 4895.98,5074.41 4950,5128.43 Rsnub2.1
NetDnsub_2: Dnsub.2 M1.2 Xformer.2 | length 2935.6
  Top Layer w50: Dnsub.2 5078.94,4900 5158.94,4980 5320.71,4980 5350,4950.71 5350,4760 5265,4675 5265,4205.39 M1.2
  Bottom Layer w50: Xformer.2@4265,2965 5190,3890 M1.2@5190,4130
NetIC_3: IC.3 Rg1.2 | length 855.4
  Top Layer w50: 4605,4505 4615,4495 v1(4770,4495) ; v1(4910,4755) 4950,4795 5100,4795 5176.42,4871.42 Rg1.2
  Bottom Layer w50: v1(4770,4495) 4770,4615 v1(4910,4755)
NetIC_4: IC.4 Rlc.2 | length 2416.4
  Top Layer w50: 4605,4600 4670,4665 v1(4670,4675) ; Rlc.2 5435,4755 v1(5485,4805)
  Bottom Layer w50: v1(4670,4675) 4670,4910 5185,5425 5510,5425 5709.29,5225.71 5709.29,5127.5 5485,4903.21 v1(5485,4805)
NetIC_6: IC.6 Rfbb.2 Rfbt.1 | length 1136.4
  Top Layer w30: 4420,4520 4491.18,4591.18 4514.02,4591.18 4517.6,4594.76 4517.6,4605.24 4514.02,4608.82 4496.18,4608.82 4430,4675
  Top Layer w50: 4420,4520 4420,4432.42 4595,4257.42 Rfbt.1 ; 4430,4675 4430,4739.8 4430,4873.5 Rfbb.2
NetM1_1: M1.1 Rg1.1 Rg2.2 | length 1099.4
  Top Layer w50: Rg2.2@5058.44,3841.37 Rg2.2 5055,4050.04 M1.1 5090,4244.96 5090,4657.8 5230,4797.8 Rg1.1
NetM1_3: M1.3 Rcs.2 Rlc.1 | length 691
  Top Layer w50: Rcs.2 5360,4085.83 M1.3 5404.17,4139.91 5435,4170.73 Rlc.1
NetRt1_1: Rt1.1 Rt2.2 | length 2380.7
  Top Layer w50: Rt2.2 3770,3070 4460,3760 4460,4211.32 4315,4356.32 Rt1.1
NetRt2_1: Rt2.1 Rt3.2 | length 427.4
  Top Layer w50: Rt3.2 3386.1,2915.2 3476.5,2824.8 Rt2.1
pads on no net: Connector1.M1 Connector1.M2 Connector2.M1 Connector2.M2 D2.1 D2.2 IC.1 Xformer.7 Xformer.8
copper on no net: | length 1822.9
  Top Layer w50: v1(3765,3635) 3765,3729.37 3793.46,3757.83 3793.46,3760 ; v1(3900,3050) 4205,2745 4590,2745 4720,2875 4765,2875
  Bottom Layer w50: v1(3765,3635) 3765,3185 v1(3900,3050)